# Altium PCB transformer.PcbDoc (part 3 of 3)
Units mm, origin at the board's own origin, x right, y up, seen from the top; angles counter-clockwise.
Board outline 350 x 350 mm, 3 copper layers (GND Top, Middle Layer, GND Bottom), stack 0.497 mm thick; 13 components, 13 nets, 121 pads, 5535 vias.
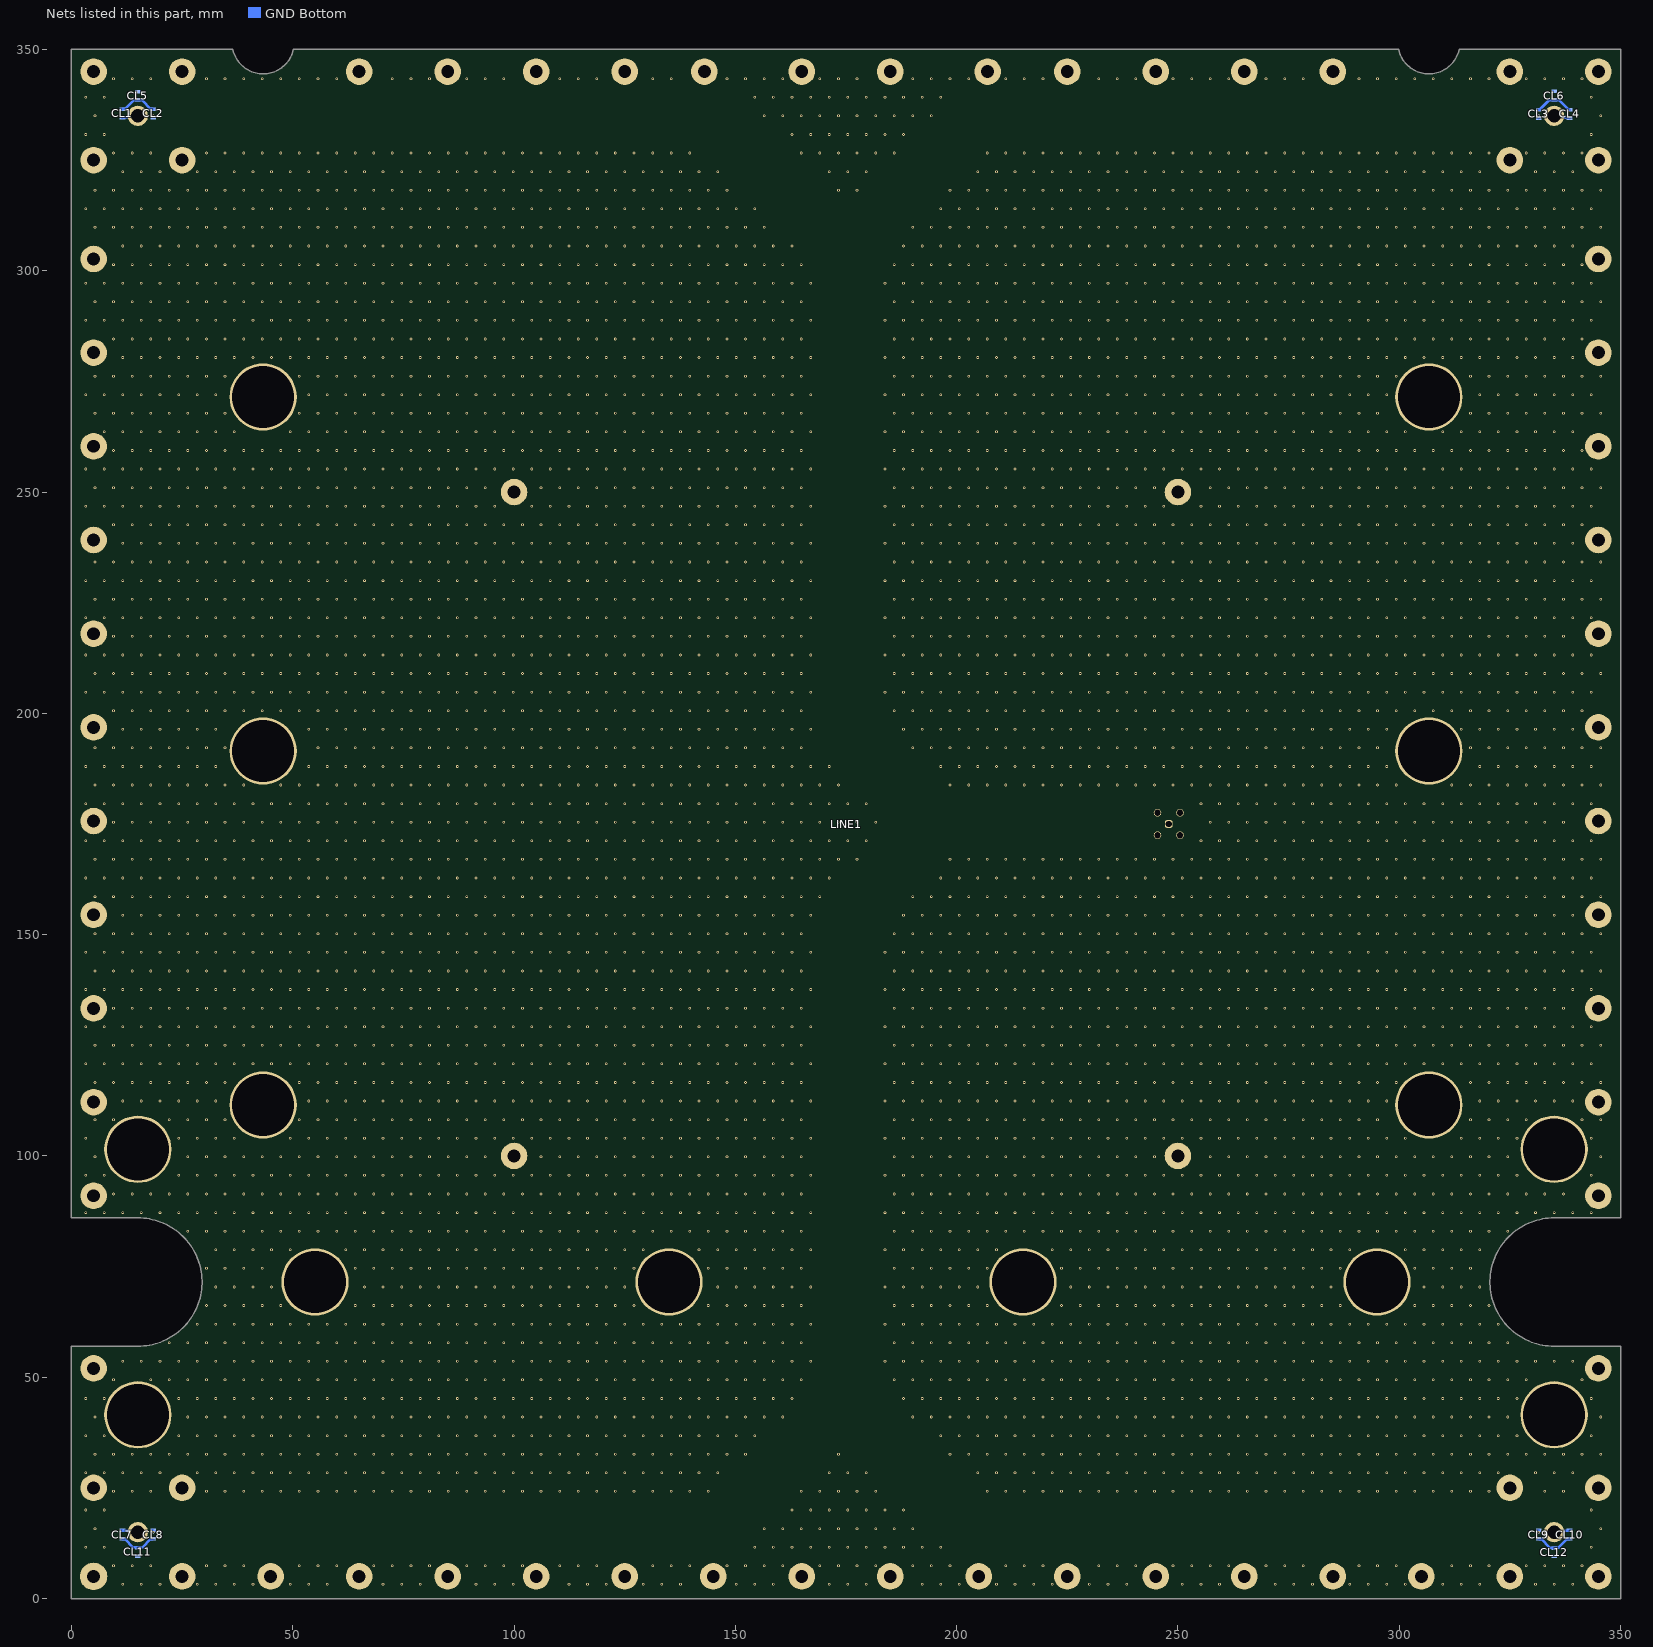
[diagram p4: the nets of this part, all layers, seen from the top]

## Via types
v1: diameter 0.6/0.6/0.6 (per signal layer), hole 0.3, GND Top to GND Bottom, 5535 vias

## Nets (pads, with @x,y where several pads share a name; then routed paths per layer and width w, separated by ;. In a path a pad name is that pad's centre, name@x,y a point inside that pad or via, vN(x,y) a via of type N, cw(c..) or ccw(c..) an arc to the next point about the centre after c; other vN are vias at no path point) (continued)
GND: (continued)
  other v1: 276.2,272 280.4,272 284.6,272 288.8,272 293,272 297.2,272 318.2,272 322.4,272 326.6,272 330.8,272 335,272 339.2,272 343.4,272 5.3,276.2 9.5,276.2 13.7,276.2 17.9,276.2 22.1,276.2 26.3,276.2 30.5,276.2 34.7,276.2 51.5,276.2 55.7,276.2 59.9,276.2 64.1,276.2 68.3,276.2 72.5,276.2 76.7,276.2 80.9,276.2 85.1,276.2 89.3,276.2 93.5,276.2 97.7,276.2 101.9,276.2 106.1,276.2 110.3,276.2 114.5,276.2 118.7,276.2 122.9,276.2 127.1,276.2 131.3,276.2 135.5,276.2 139.7,276.2 143.9,276.2 148.1,276.2 152.3,276.2 156.5,276.2 160.7,276.2 164.9,276.2 185.9,276.2 190.1,276.2 194.3,276.2 198.5,276.2 202.7,276.2 206.9,276.2 211.1,276.2 215.3,276.2 219.5,276.2 223.7,276.2 227.9,276.2 232.1,276.2 236.3,276.2 240.5,276.2 244.7,276.2 248.9,276.2 253.1,276.2 257.3,276.2 261.5,276.2 265.7,276.2 269.9,276.2 274.1,276.2 278.3,276.2 282.5,276.2 286.7,276.2 290.9,276.2 295.1,276.2 299.3,276.2 316.1,276.2 320.3,276.2 324.5,276.2 328.7,276.2 332.9,276.2 337.1,276.2 341.3,276.2 345.5,276.2 11.6,280.4 15.8,280.4 20,280.4 24.2,280.4 28.4,280.4 32.6,280.4 36.8,280.4 41,280.4 45.2,280.4 49.4,280.4 53.6,280.4 57.8,280.4 62,280.4 66.2,280.4 70.4,280.4 74.6,280.4 78.8,280.4 83,280.4 87.2,280.4 91.4,280.4 95.6,280.4 99.8,280.4 104,280.4 108.2,280.4 112.4,280.4 116.6,280.4 120.8,280.4 125,280.4 129.2,280.4 133.4,280.4 137.6,280.4 141.8,280.4 146,280.4 150.2,280.4 154.4,280.4 158.6,280.4 162.8,280.4 167,280.4 183.8,280.4 188,280.4 192.2,280.4 196.4,280.4 200.6,280.4 204.8,280.4 209,280.4 213.2,280.4 217.4,280.4 221.6,280.4 225.8,280.4 230,280.4 234.2,280.4 238.4,280.4 242.6,280.4 246.8,280.4 251,280.4 255.2,280.4 259.4,280.4 263.6,280.4 267.8,280.4 272,280.4 276.2,280.4 280.4,280.4 284.6,280.4 288.8,280.4 293,280.4 297.2,280.4 301.4,280.4 305.6,280.4 309.8,280.4 314,280.4 318.2,280.4 322.4,280.4 326.6,280.4 330.8,280.4 335,280.4 339.2,280.4 9.5,284.6 13.7,284.6 17.9,284.6 22.1,284.6 26.3,284.6 30.5,284.6 34.7,284.6 38.9,284.6 43.1,284.6 47.3,284.6 51.5,284.6 55.7,284.6 59.9,284.6 64.1,284.6 68.3,284.6 72.5,284.6 76.7,284.6 80.9,284.6 85.1,284.6 89.3,284.6 93.5,284.6 97.7,284.6 101.9,284.6 106.1,284.6 110.3,284.6 114.5,284.6 118.7,284.6 122.9,284.6 127.1,284.6 131.3,284.6 135.5,284.6 139.7,284.6 143.9,284.6 148.1,284.6 152.3,284.6 156.5,284.6 160.7,284.6 164.9,284.6 185.9,284.6 190.1,284.6 194.3,284.6 198.5,284.6 202.7,284.6 206.9,284.6 211.1,284.6 215.3,284.6 219.5,284.6 223.7,284.6 227.9,284.6 232.1,284.6 236.3,284.6 240.5,284.6 244.7,284.6 248.9,284.6 253.1,284.6 257.3,284.6 261.5,284.6 265.7,284.6 269.9,284.6 274.1,284.6 278.3,284.6 282.5,284.6 286.7,284.6 290.9,284.6 295.1,284.6 299.3,284.6 303.5,284.6 307.7,284.6 311.9,284.6 316.1,284.6 320.3,284.6 324.5,284.6 328.7,284.6 332.9,284.6 337.1,284.6 341.3,284.6 3.2,288.8 7.4,288.8 11.6,288.8 15.8,288.8 20,288.8 24.2,288.8 28.4,288.8 32.6,288.8 36.8,288.8 41,288.8 45.2,288.8 49.4,288.8 53.6,288.8 57.8,288.8 62,288.8 66.2,288.8 70.4,288.8 74.6,288.8 78.8,288.8 83,288.8 87.2,288.8 91.4,288.8 95.6,288.8 99.8,288.8 104,288.8 108.2,288.8 112.4,288.8 116.6,288.8 120.8,288.8 125,288.8 129.2,288.8 133.4,288.8 137.6,288.8 141.8,288.8 146,288.8 150.2,288.8 154.4,288.8 158.6,288.8 162.8,288.8 167,288.8 183.8,288.8 188,288.8 192.2,288.8 196.4,288.8 200.6,288.8 204.8,288.8 209,288.8 213.2,288.8 217.4,288.8 221.6,288.8 225.8,288.8 230,288.8 234.2,288.8 238.4,288.8 242.6,288.8 246.8,288.8 251,288.8 255.2,288.8 259.4,288.8 263.6,288.8 267.8,288.8 272,288.8 276.2,288.8 280.4,288.8 284.6,288.8 288.8,288.8 293,288.8 297.2,288.8 301.4,288.8 305.6,288.8 309.8,288.8 314,288.8 318.2,288.8 322.4,288.8 326.6,288.8 330.8,288.8 335,288.8 339.2,288.8 343.4,288.8 5.3,293 9.5,293 13.7,293 17.9,293 22.1,293 26.3,293 30.5,293 34.7,293 38.9,293 43.1,293 47.3,293 51.5,293 55.7,293 59.9,293 64.1,293 68.3,293 72.5,293 76.7,293 80.9,293 85.1,293 89.3,293 93.5,293 97.7,293 101.9,293 106.1,293 110.3,293 114.5,293 118.7,293 122.9,293 127.1,293 131.3,293 135.5,293 139.7,293 143.9,293 148.1,293 152.3,293 156.5,293 160.7,293 164.9,293 185.9,293 190.1,293 194.3,293 198.5,293 202.7,293 206.9,293 211.1,293 215.3,293 219.5,293 223.7,293 227.9,293 232.1,293 236.3,293 240.5,293 244.7,293 248.9,293 253.1,293 257.3,293 261.5,293 265.7,293 269.9,293 274.1,293 278.3,293 282.5,293 286.7,293 290.9,293 295.1,293 299.3,293 303.5,293 307.7,293 311.9,293 316.1,293 320.3,293 324.5,293 328.7,293 332.9,293 337.1,293 341.3,293 345.5,293 3.2,297.2 7.4,297.2 11.6,297.2 15.8,297.2 20,297.2 24.2,297.2 28.4,297.2 32.6,297.2 36.8,297.2 41,297.2 45.2,297.2 49.4,297.2 53.6,297.2 57.8,297.2 62,297.2 66.2,297.2 70.4,297.2 74.6,297.2 78.8,297.2 83,297.2 87.2,297.2 91.4,297.2 95.6,297.2 99.8,297.2 104,297.2 108.2,297.2 112.4,297.2 116.6,297.2 120.8,297.2 125,297.2 129.2,297.2 133.4,297.2 137.6,297.2 141.8,297.2 146,297.2 150.2,297.2 154.4,297.2 158.6,297.2 162.8,297.2 167,297.2 183.8,297.2 188,297.2 192.2,297.2 196.4,297.2 200.6,297.2 204.8,297.2 209,297.2 213.2,297.2 217.4,297.2 221.6,297.2 225.8,297.2 230,297.2 234.2,297.2 238.4,297.2 242.6,297.2 246.8,297.2 251,297.2 255.2,297.2 259.4,297.2 263.6,297.2 267.8,297.2 272,297.2 276.2,297.2 280.4,297.2 284.6,297.2 288.8,297.2 293,297.2 297.2,297.2 301.4,297.2 305.6,297.2 309.8,297.2 314,297.2 318.2,297.2 322.4,297.2 326.6,297.2 330.8,297.2 335,297.2 339.2,297.2 343.4,297.2 9.5,301.4 13.7,301.4 17.9,301.4 22.1,301.4 26.3,301.4 30.5,301.4 34.7,301.4 38.9,301.4 43.1,301.4 47.3,301.4 51.5,301.4 55.7,301.4 59.9,301.4 64.1,301.4 68.3,301.4 72.5,301.4 76.7,301.4 80.9,301.4 85.1,301.4 89.3,301.4 93.5,301.4 97.7,301.4 101.9,301.4 106.1,301.4 110.3,301.4 114.5,301.4 118.7,301.4 122.9,301.4 127.1,301.4 131.3,301.4 135.5,301.4 139.7,301.4 143.9,301.4 148.1,301.4 152.3,301.4 156.5,301.4 160.7,301.4 164.9,301.4 185.9,301.4 190.1,301.4 194.3,301.4 198.5,301.4 202.7,301.4 206.9,301.4 211.1,301.4 215.3,301.4 219.5,301.4 223.7,301.4 227.9,301.4 232.1,301.4 236.3,301.4 240.5,301.4 244.7,301.4 248.9,301.4 253.1,301.4 257.3,301.4 261.5,301.4 265.7,301.4 269.9,301.4 274.1,301.4 278.3,301.4 282.5,301.4 286.7,301.4 290.9,301.4 295.1,301.4 299.3,301.4 303.5,301.4 307.7,301.4 311.9,301.4 316.1,301.4 320.3,301.4 324.5,301.4 328.7,301.4 332.9,301.4 337.1,301.4 341.3,301.4 11.6,305.6 15.8,305.6 20,305.6 24.2,305.6 28.4,305.6 32.6,305.6 36.8,305.6 41,305.6 45.2,305.6 49.4,305.6 53.6,305.6 57.8,305.6 62,305.6 66.2,305.6 70.4,305.6 74.6,305.6 78.8,305.6 83,305.6 87.2,305.6 91.4,305.6 95.6,305.6 99.8,305.6 104,305.6 108.2,305.6 112.4,305.6 116.6,305.6 120.8,305.6 125,305.6 129.2,305.6 133.4,305.6 137.6,305.6 141.8,305.6 146,305.6 150.2,305.6 154.4,305.6 158.6,305.6 162.8,305.6 188,305.6 192.2,305.6 196.4,305.6 200.6,305.6 204.8,305.6 209,305.6 213.2,305.6 217.4,305.6 221.6,305.6 225.8,305.6 230,305.6 234.2,305.6 238.4,305.6 242.6,305.6 246.8,305.6 251,305.6 255.2,305.6 259.4,305.6 263.6,305.6 267.8,305.6 272,305.6 276.2,305.6 280.4,305.6 284.6,305.6 288.8,305.6 293,305.6 297.2,305.6 301.4,305.6 305.6,305.6 309.8,305.6 314,305.6 318.2,305.6 322.4,305.6 326.6,305.6 330.8,305.6 335,305.6 339.2,305.6 5.3,309.8 9.5,309.8 13.7,309.8 17.9,309.8 22.1,309.8 26.3,309.8 30.5,309.8 34.7,309.8 38.9,309.8 43.1,309.8 47.3,309.8 51.5,309.8 55.7,309.8 59.9,309.8 64.1,309.8 68.3,309.8 72.5,309.8 76.7,309.8 80.9,309.8 85.1,309.8 89.3,309.8 93.5,309.8 97.7,309.8 101.9,309.8 106.1,309.8 110.3,309.8 114.5,309.8 118.7,309.8 122.9,309.8 127.1,309.8 131.3,309.8 135.5,309.8 139.7,309.8 143.9,309.8 148.1,309.8 152.3,309.8 156.5,309.8 190.1,309.8 194.3,309.8 198.5,309.8 202.7,309.8 206.9,309.8 211.1,309.8 215.3,309.8 219.5,309.8 223.7,309.8 227.9,309.8 232.1,309.8 236.3,309.8 240.5,309.8 244.7,309.8 248.9,309.8 253.1,309.8 257.3,309.8 261.5,309.8 265.7,309.8 269.9,309.8 274.1,309.8 278.3,309.8 282.5,309.8 286.7,309.8 290.9,309.8 295.1,309.8 299.3,309.8 303.5,309.8 307.7,309.8 311.9,309.8 316.1,309.8 320.3,309.8 324.5,309.8 328.7,309.8 332.9,309.8 337.1,309.8 341.3,309.8 345.5,309.8 3.2,314 7.4,314 11.6,314 15.8,314 20,314 24.2,314 28.4,314 32.6,314 36.8,314 41,314 45.2,314 49.4,314 53.6,314 57.8,314 62,314 66.2,314 70.4,314 74.6,314 78.8,314 83,314 87.2,314 91.4,314 95.6,314 99.8,314 104,314 108.2,314 112.4,314 116.6,314 120.8,314 125,314 129.2,314 133.4,314 137.6,314 141.8,314 146,314 150.2,314 154.4,314 196.4,314 200.6,314 204.8,314 209,314 213.2,314 217.4,314 221.6,314 225.8,314 230,314 234.2,314 238.4,314 242.6,314 246.8,314 251,314 255.2,314 259.4,314 263.6,314 267.8,314 272,314 276.2,314 280.4,314 284.6,314 288.8,314 293,314 297.2,314 301.4,314 305.6,314 309.8,314 314,314 318.2,314 322.4,314 326.6,314 330.8,314 335,314 339.2,314 343.4,314 5.3,318.2 9.5,318.2 13.7,318.2 17.9,318.2 22.1,318.2 26.3,318.2 30.5,318.2 34.7,318.2 38.9,318.2 43.1,318.2 47.3,318.2 51.5,318.2 55.7,318.2 59.9,318.2 64.1,318.2 68.3,318.2 72.5,318.2 76.7,318.2 80.9,318.2 85.1,318.2 89.3,318.2 93.5,318.2 97.7,318.2 101.9,318.2 106.1,318.2 110.3,318.2 114.5,318.2 118.7,318.2 122.9,318.2 127.1,318.2 131.3,318.2 135.5,318.2 139.7,318.2 143.9,318.2 148.1,318.2 173.3,318.2 177.5,318.2 198.5,318.2 202.7,318.2 206.9,318.2 211.1,318.2 215.3,318.2 219.5,318.2 223.7,318.2 227.9,318.2 232.1,318.2 236.3,318.2 240.5,318.2 244.7,318.2 248.9,318.2 253.1,318.2 257.3,318.2 261.5,318.2 265.7,318.2 269.9,318.2 274.1,318.2 278.3,318.2 282.5,318.2 286.7,318.2 290.9,318.2 295.1,318.2 299.3,318.2 303.5,318.2 307.7,318.2 311.9,318.2 316.1,318.2 320.3,318.2 324.5,318.2 328.7,318.2 332.9,318.2 337.1,318.2 341.3,318.2 345.5,318.2 11.6,322.4 15.8,322.4 20,322.4 28.4,322.4 32.6,322.4 36.8,322.4 41,322.4 45.2,322.4 49.4,322.4 53.6,322.4 57.8,322.4 62,322.4 66.2,322.4 70.4,322.4 74.6,322.4 78.8,322.4 83,322.4 87.2,322.4 91.4,322.4 95.6,322.4 99.8,322.4 104,322.4 108.2,322.4 112.4,322.4 116.6,322.4 120.8,322.4 125,322.4 129.2,322.4 133.4,322.4 137.6,322.4 141.8,322.4 146,322.4 171.2,322.4 175.4,322.4 179.6,322.4 204.8,322.4 209,322.4 213.2,322.4 217.4,322.4 221.6,322.4 225.8,322.4 230,322.4 234.2,322.4 238.4,322.4 242.6,322.4 246.8,322.4 251,322.4 255.2,322.4 259.4,322.4 263.6,322.4 267.8,322.4 272,322.4 276.2,322.4 280.4,322.4 284.6,322.4 288.8,322.4 293,322.4 297.2,322.4 301.4,322.4 305.6,322.4 309.8,322.4 314,322.4 318.2,322.4 330.8,322.4 335,322.4 339.2,322.4 9.5,326.6 13.7,326.6 17.9,326.6 30.5,326.6 34.7,326.6 38.9,326.6 43.1,326.6 47.3,326.6 51.5,326.6 55.7,326.6 59.9,326.6 64.1,326.6 68.3,326.6 72.5,326.6 76.7,326.6 80.9,326.6 85.1,326.6 89.3,326.6 93.5,326.6 97.7,326.6 101.9,326.6 106.1,326.6 110.3,326.6 114.5,326.6 118.7,326.6 122.9,326.6 127.1,326.6 131.3,326.6 135.5,326.6 139.7,326.6 164.9,326.6 169.1,326.6 173.3,326.6 177.5,326.6 181.7,326.6 185.9,326.6 206.9,326.6 211.1,326.6 215.3,326.6 219.5,326.6 223.7,326.6 227.9,326.6 232.1,326.6 236.3,326.6 240.5,326.6 244.7,326.6 248.9,326.6 253.1,326.6 257.3,326.6 261.5,326.6 265.7,326.6 269.9,326.6 274.1,326.6 278.3,326.6 282.5,326.6 286.7,326.6 290.9,326.6 295.1,326.6 299.3,326.6 303.5,326.6 307.7,326.6 311.9,326.6 316.1,326.6 320.3,326.6 328.7,326.6 332.9,326.6 337.1,326.6 341.3,326.6 3.2,330.8 7.4,330.8 162.8,330.8 167,330.8 171.2,330.8 175.4,330.8 179.6,330.8 183.8,330.8 188,330.8 343.4,330.8 5.3,335 156.5,335 160.7,335 164.9,335 169.1,335 173.3,335 177.5,335 181.7,335 185.9,335 190.1,335 194.3,335 345.5,335 3.2,339.2 7.4,339.2 154.4,339.2 158.6,339.2 162.8,339.2 167,339.2 171.2,339.2 175.4,339.2 179.6,339.2 183.8,339.2 188,339.2 192.2,339.2 196.4,339.2 343.4,339.2 9.5,343.4 13.7,343.4 17.9,343.4 30.5,343.4 34.7,343.4 38.9,343.4 43.1,343.4 47.3,343.4 51.5,343.4 55.7,343.4 59.9,343.4 72.5,343.4 76.7,343.4 80.9,343.4 89.3,343.4 93.5,343.4 97.7,343.4 110.3,343.4 114.5,343.4 118.7,343.4 131.3,343.4 135.5,343.4 148.1,343.4 152.3,343.4 156.5,343.4 160.7,343.4 169.1,343.4 173.3,343.4 177.5,343.4 190.1,343.4 194.3,343.4 198.5,343.4 202.7,343.4 211.1,343.4 215.3,343.4 219.5,343.4 232.1,343.4 236.3,343.4 240.5,343.4 248.9,343.4 253.1,343.4 257.3,343.4 261.5,343.4 269.9,343.4 274.1,343.4 278.3,343.4 290.9,343.4 295.1,343.4 299.3,343.4 303.5,343.4 307.7,343.4 311.9,343.4 316.1,343.4 320.3,343.4 328.7,343.4 332.9,343.4 337.1,343.4 341.3,343.4
NetCL1_2: CL1.2 CL2.1 CL5.2 | length 8.7
  GND Bottom w0.6: CL1.2@11.5,336.5 11.6,336.6 12.1,336.6 14,338.5 14.9,338.5 CL5.2@15,338.6 15.1,338.5 16,338.5 17.9,336.6 18.4,336.6 CL2.1@18.5,336.5
NetCL2_2: 
NetCL3_1: 
NetCL3_2: CL3.2 CL4.1 CL6.2 | length 8.9
  GND Bottom w0.6: CL3.2@331.5,336.4 331.75,336.4 333.9,338.55 334.9,338.55 CL6.2@335,338.65 335.061,338.589 336.061,338.589 338.15,336.5 338.4,336.5 CL4.1@338.5,336.4
NetCL7_2: CL7.2 CL8.1 CL11.2 | length 8.7
  GND Bottom w0.6: CL7.2@11.5,13.5 11.6,13.4 12.1,13.4 13.939,11.561 14.939,11.561 CL11.2@15,11.5 15.061,11.561 16.061,11.561 17.9,13.4 18.4,13.4 CL8.1@18.5,13.5
NetCL8_2: CL8.2 LINE1.1@18.5,15 | length 0.4
  GND Bottom w0.6: LINE1.1@18.5,15 CL8.2@18.5,15.4
NetCL9_1: CL2.2 CL3.1 CL9.1 LINE1.1@18.5,335 LINE1.1@247.925,175 LINE1.1@331.5,15 LINE1.1@331.5,335 | length 0.9
  GND Bottom w0.6: LINE1.1@331.5,15 CL9.1@331.5,15.4 ; CL3.1@331.5,334.5 LINE1.1@331.5,335
NetCL9_2: CL9.2 CL10.1 CL12.2 | length 8.7
  GND Bottom w0.6: CL9.2@331.5,13.5 331.6,13.4 332.1,13.4 334,11.5 334.9,11.5 CL12.2@335,11.4 335.1,11.5 336,11.5 337.9,13.4 338.4,13.4 CL10.1@338.5,13.5
NewNet1: CL1.1 pad.2@15,335 | length 3.7
  GND Bottom w0.6: CL1.1@11.5,334.6 11.6,334.7 14.7,334.7 pad.2@15,335
NewNet2: CL4.2 pad.2@335,335 | length 3.7
  GND Bottom w0.6: pad.2@335,335 335.4,334.6 338.4,334.6 CL4.2@338.5,334.5
NewNet3: CL10.2 pad.2@335,15 | length 3.7
  GND Bottom w0.6: pad.2@335,15 335.3,15.3 338.4,15.3 CL10.2@338.5,15.4
NewNet4: CL7.1 pad.2@15,15 | length 3.7
  GND Bottom w0.6: CL7.1@11.5,15.4 11.6,15.3 14.7,15.3 pad.2@15,15
copper on no net: | length 0.7
  Middle Layer w0.013: 145,14.77 ccw(c145,15) 145.163,14.837 ; 145,335.23 cw(c145,335) 145.163,335.163 ; 204.837,14.837 ccw(c205,15) 205,14.77 ; 204.837,335.163 cw(c205,335) 205,335.23

## Polygon pours and split planes (outlines as drawn)
GND on GND Top "NONET_L01_P-001" (solid, pour order 6): 0.4,0.4 0.4,349.6 349.6,349.6 349.6,0.4
GND on GND Bottom "NONET_L01_P-001" (solid, remove dead copper, pour order 3): 0.4,349.652 0.47,0.4 349.6,0.4 349.6,349.581

## Other copper
GND Top:
  pour cut-out: 244.67,175 ccw(c247.922,175) 247.922,171.749 ccw(c247.922,175) 251.173,175 ccw(c247.922,175) 247.922,178.251 ccw(c247.922,175)
  pour cut-out: 313.9,350 cw(c306.65,351.607) 299.4,350
  pour cut-out: 36.1,350 ccw(c43.35,351.607) 50.6,350
  pour cut-out: 334.5,86.4 ccw(c334.861,71.643) 320.1,71.5 ccw(c334.804,71.302) 334.5,56.6
  pour cut-out: 15.5,86.4 cw(c15.139,71.643) 29.9,71.5 cw(c15.196,71.302) 15.5,56.6
  pour cut-out: 15,330 cw(c15,335) 10,335 cw(c15,335) 15,340 cw(c15,335) 20,335 cw(c15,335)
  pour cut-out: 15,10 cw(c15,15) 10,15 cw(c15,15) 15,20 cw(c15,15) 20,15 cw(c15,15)
  pour cut-out: 335,10 cw(c335,15) 330,15 cw(c335,15) 335,20 cw(c335,15) 340,15 cw(c335,15)
  pour cut-out: 335,330 cw(c335,335) 330,335 cw(c335,335) 335,340 cw(c335,335) 340,335 cw(c335,335)
  pour cut-out: 349.569,56.6 334.5,56.6 334.5,86.4 349.569,86.4
  pour cut-out: 0.431,56.6 15.5,56.6 15.5,86.4 0.431,86.4
GND Bottom:
  pour cut-out: 244.67,175 ccw(c247.922,175) 247.922,171.749 ccw(c247.922,175) 251.173,175 ccw(c247.922,175) 247.922,178.251 ccw(c247.922,175)
  pour cut-out: 15,10 cw(c15,15) 10,15 cw(c15,15) 15,20 cw(c15,15) 20,15 cw(c15,15)
  pour cut-out: 36.1,350 ccw(c43.35,351.607) 50.6,350
  pour cut-out: 313.9,350 cw(c306.65,351.607) 299.4,350
  pour cut-out: 334.5,86.4 ccw(c334.861,71.643) 320.1,71.5 ccw(c334.804,71.302) 334.5,56.6
  pour cut-out: 15.5,86.4 cw(c15.139,71.643) 29.9,71.5 cw(c15.196,71.302) 15.5,56.6
  pour cut-out: 15,330 cw(c15,335) 10,335 cw(c15,335) 15,340 cw(c15,335) 20,335 cw(c15,335)
  pour cut-out: 335,10 cw(c335,15) 330,15 cw(c335,15) 335,20 cw(c335,15) 340,15 cw(c335,15)
  pour cut-out: 335,330 cw(c335,335) 330,335 cw(c335,335) 335,340 cw(c335,335) 340,335 cw(c335,335)
  pour cut-out: 0.431,56.6 15.5,56.6 15.5,86.4 0.431,86.4
  pour cut-out: 349.569,56.6 334.5,56.6 334.5,86.4 349.569,86.4

## Silkscreen, mask and mechanical layers (free items; w line width, h text height)
Mechanical 1:
  circle w0.006: c12.551,56.5 r0.003
  lines w0.013: 0,0 0.037,0 350,0 350,57 335,57 cw(c335,71.5) 335,86 350,86 350,350 313.537,350 cw(c306.7,351.5) 299.863,350 50.137,350 cw(c43.3,351.5) 36.463,350 0,350 0,86 15,86 cw(c15,71.5) 15,57 0,57 0,0
Mechanical 2:
  circle w0.006: c12.551,56.5 r0.003
  circle w0.006: c0,0 r0.003
  circle w0.013: c100,100 r1.45
  circle w0.013: c250,100 r1.45
  circle w0.013: c250,250 r1.45
  circle w0.013: c100,250 r1.45
  circle w0.013: c325,325 r1.45
  circle w0.013: c325,25 r1.45
  circle w0.013: c43.3,191.5 r7
  circle w0.013: c43.3,271.5 r7
  circle w0.013: c306.7,271.5 r7
  circle w0.013: c306.7,191.5 r7
  circle w0.013: c43.3,111.5 r7
  circle w0.013: c15,101.5 r7
  circle w0.013: c15,41.5 r7
  circle w0.013: c55,71.5 r7
  circle w0.013: c135,71.5 r7
  circle w0.013: c215,71.5 r7
  circle w0.013: c335,41.5 r7
  circle w0.013: c295,71.5 r7
  circle w0.013: c306.7,111.5 r7
  circle w0.013: c335,101.5 r7
  circle w0.013: c345,25 r1.45
  circle w0.013: c345,52 r1.45
  circle w0.013: c345,325 r1.45
  circle w0.013: c345,302.667 r1.45
  circle w0.013: c345,281.5 r1.45
  circle w0.013: c345,260.333 r1.45
  circle w0.013: c345,239.167 r1.45
  circle w0.013: c345,218 r1.45
  circle w0.013: c345,196.833 r1.45
  circle w0.013: c345,175.667 r1.45
  circle w0.013: c345,154.5 r1.45
  circle w0.013: c345,133.333 r1.45
  circle w0.013: c345,112.167 r1.45
  circle w0.013: c345,91 r1.45
  circle w0.013: c5,91 r1.45
  circle w0.013: c5,112.167 r1.45
  circle w0.013: c5,133.333 r1.45
  circle w0.013: c5,154.5 r1.45
  circle w0.013: c5,175.667 r1.45
  circle w0.013: c5,196.833 r1.45
  circle w0.013: c5,218 r1.45
  circle w0.013: c5,239.167 r1.45
  circle w0.013: c5,260.333 r1.45
  circle w0.013: c5,281.5 r1.45
  circle w0.013: c5,302.667 r1.45
  circle w0.013: c25,25 r1.45
  circle w0.013: c25,325 r1.45
  circle w0.013: c5,325 r1.45
  circle w0.013: c335,335 r5
  circle w0.013: c15,335 r5
  circle w0.013: c15,15 r5
  circle w0.013: c335,15 r5
  circle w0.013: c247.925,175 r7.225
  circle w0.013: c185,5 r1.45
  circle w0.013: c205,5 r1.45
  circle w0.013: c225,5 r1.45
  circle w0.013: c245,5 r1.45
  circle w0.013: c265,5 r1.45
  circle w0.013: c285,5 r1.45
  circle w0.013: c305,5 r1.45
  circle w0.013: c325,5 r1.45
  circle w0.013: c185,345 r1.45
  circle w0.013: c207,345 r1.45
  circle w0.013: c225,345 r1.45
  circle w0.013: c245,345 r1.45
  circle w0.013: c265,345 r1.45
  circle w0.013: c285,345 r1.45
  circle w0.013: c325,345 r1.45
  circle w0.013: c165,345 r1.45
  circle w0.013: c143,345 r1.45
  circle w0.013: c125,345 r1.45
  circle w0.013: c105,345 r1.45
  circle w0.013: c85,345 r1.45
  circle w0.013: c65,345 r1.45
  circle w0.013: c25,345 r1.45
  circle w0.013: c165,5 r1.45
  circle w0.013: c145,5 r1.45
  circle w0.013: c125,5 r1.45
  circle w0.013: c105,5 r1.45
  circle w0.013: c85,5 r1.45
  circle w0.013: c65,5 r1.45
  circle w0.013: c45,5 r1.45
  circle w0.013: c25,5 r1.45
  circle w0.013: c345,5 r1.45
  circle w0.013: c345,345 r1.45
  circle w0.013: c5,52 r1.45
  circle w0.013: c5,25 r1.45
  circle w0.013: c5,5 r1.45
  circle w0.013: c5,345 r1.45
  lines w0.013: 0,0 0,57 15,57 ccw(c15,71.5) 15,86 0,86 0,350 36.463,350 ccw(c43.3,351.5) 50.137,350 299.863,350 ccw(c306.7,351.5) 313.537,350 350,350 350,86 335,86 ccw(c335,71.5) 335,57 350,57 350,0 0,0
Mechanical 3:
  drawing of 718 lines, arcs and shapes, not listed